# Altium PCB ARDUINO.PcbDoc
Units mm, origin at the board's own origin, x right, y up, seen from the top; angles counter-clockwise.
Board outline 68.53 x 53.3 mm, 2 copper layers (Top Layer, Bottom Layer); 16 components, 30 nets, 68 pads, 7 vias.
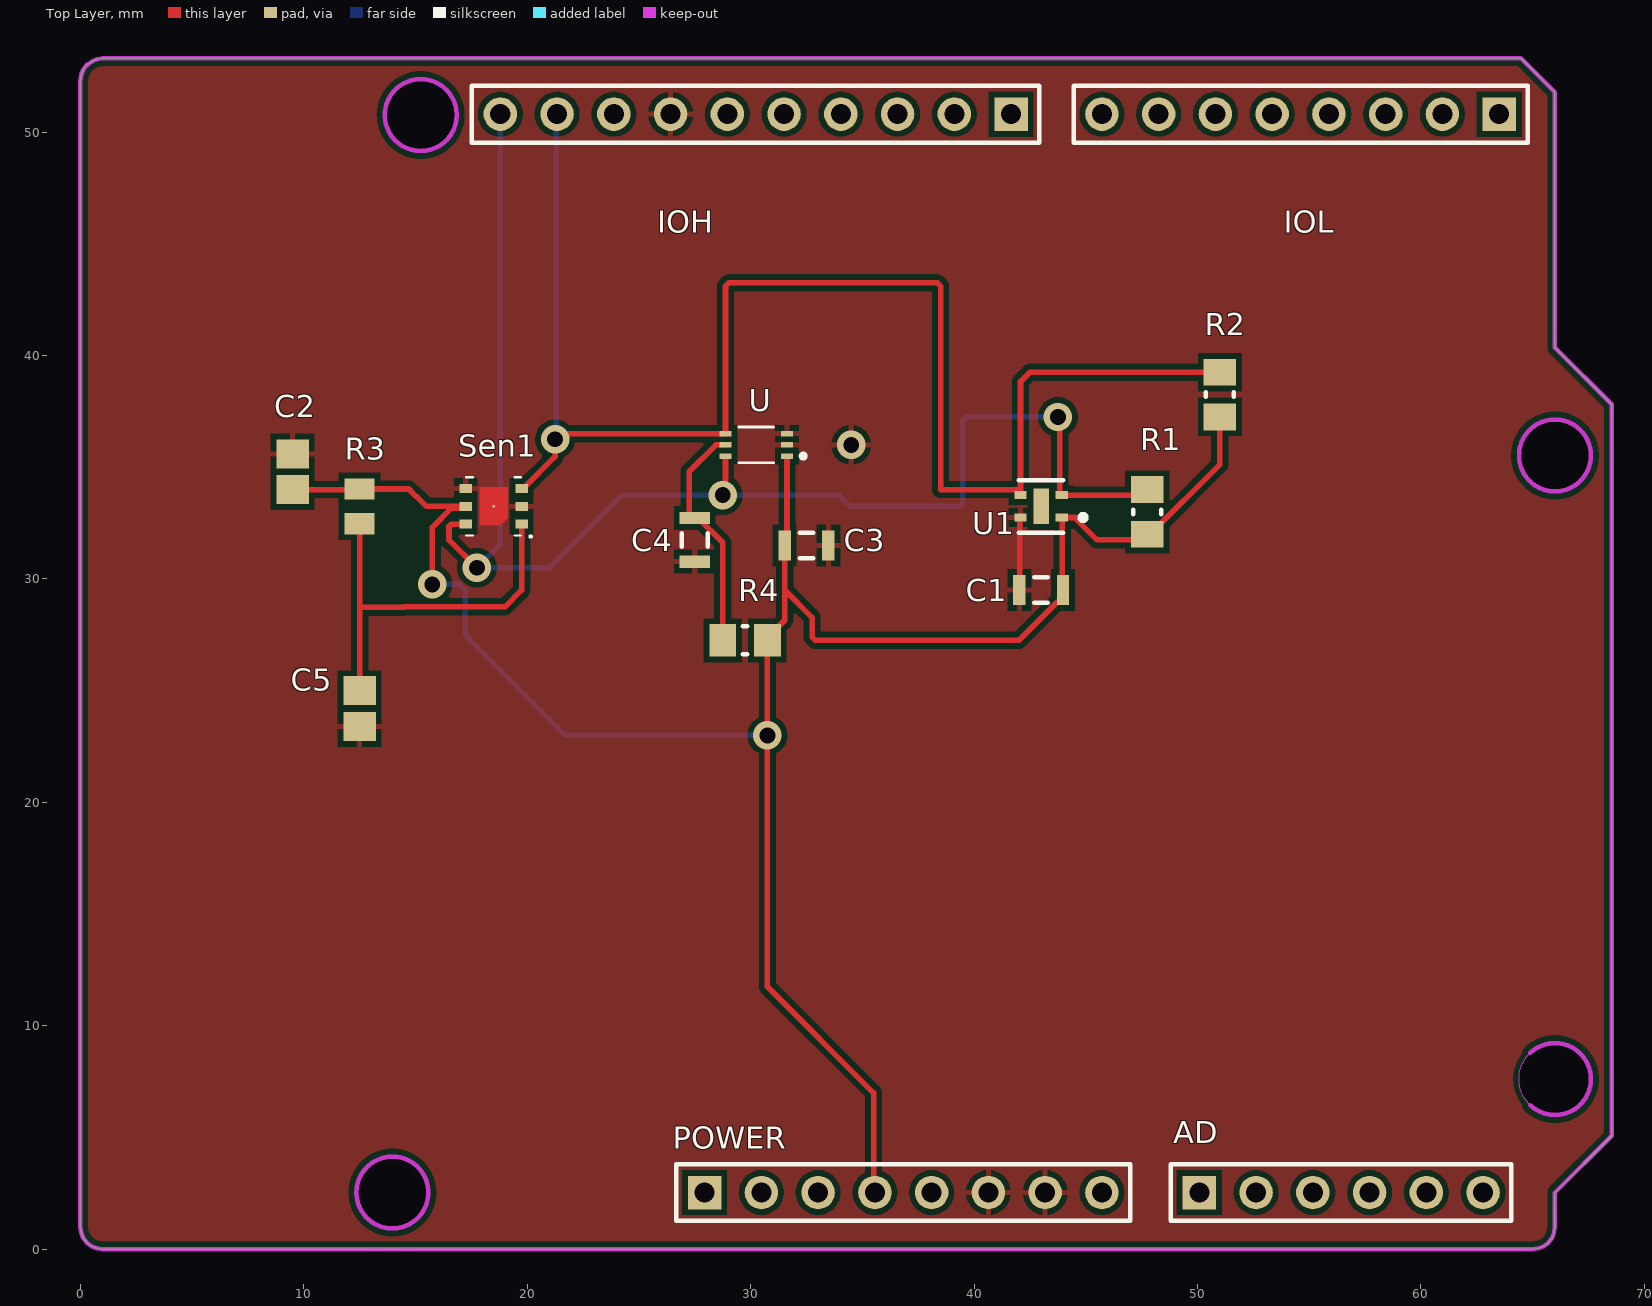
[diagram p0: Top Layer view]
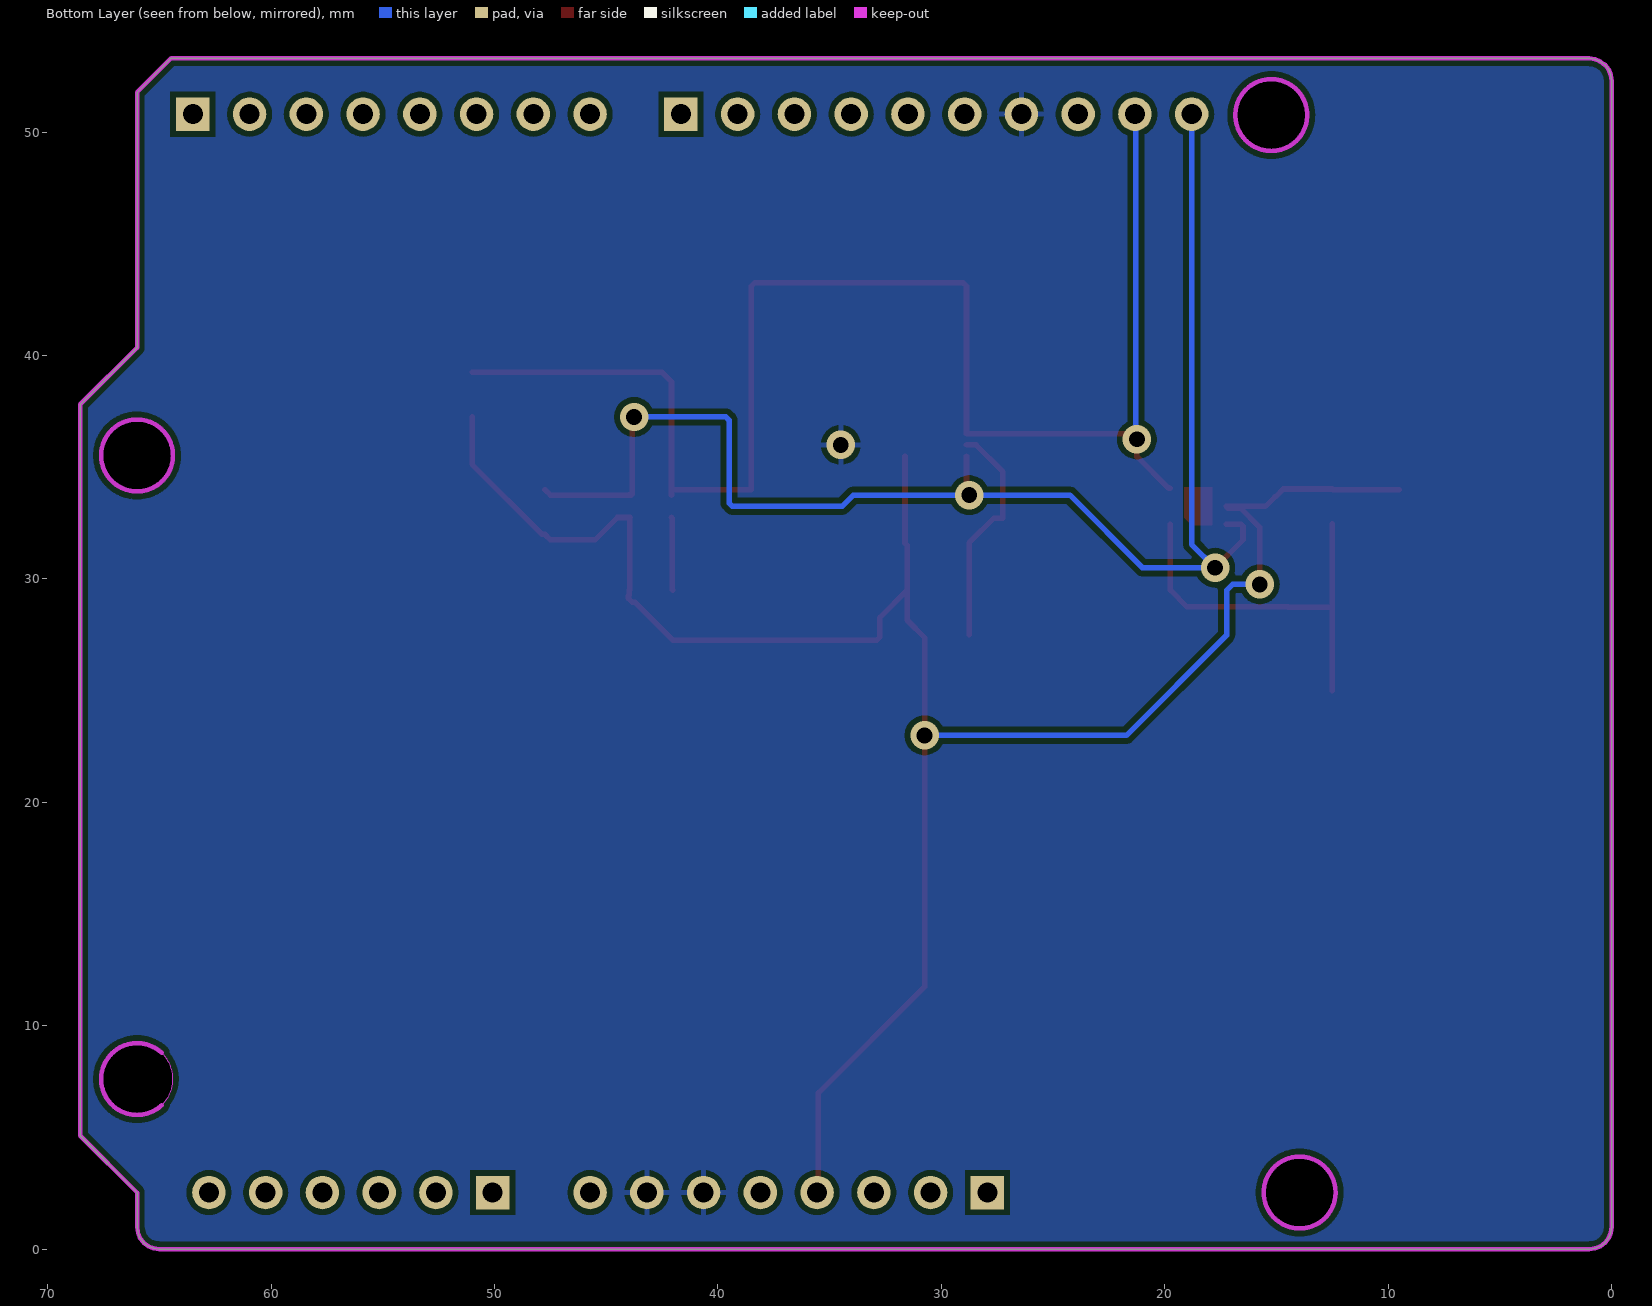
[diagram p1: Bottom Layer view, seen from below]

## Layer stack, top to bottom
Top Solder: solder mask 0.0102, Solder Resist, Dk 3.5
Top Layer: signal copper 0.0356
Dielectric 1: dielectric 0.32, FR-4, Dk 4.8
Bottom Layer: signal copper 0.0356
Bottom Solder: solder mask 0.0102, Solder Resist, Dk 3.5

## Board outline
0.296,0.296 0.127,0.508 0.042,0.741 0,0.994 0,52.284 0.042,52.559 0.127,52.792 0.296,53.004 0.508,53.152 0.741,53.258 0.994,53.3 64.472,53.3 65.996,51.777 65.996,40.351 68.535,37.811 68.535,5.078 65.996,2.539 65.996,0.994 65.953,0.741 65.869,0.508 65.699,0.296 65.488,0.127 65.255,0.042 65.001,0 0.994,0 0.741,0.042 0.508,0.127
cut-out: 12.579,1.724 12.551,1.773 12.526,1.822 12.502,1.873 12.479,1.924 12.459,1.976 12.44,2.028 12.424,2.081 12.409,2.135 12.396,2.189 12.384,2.244 12.375,2.299 12.368,2.354 12.362,2.409 12.359,2.465 12.357,2.521 12.357,2.576 12.36,2.632 12.364,2.687 12.37,2.743 12.378,2.798 12.388,2.853 12.4,2.907 12.413,2.961 12.429,3.015 12.446,3.068 12.466,3.12 12.487,3.172 12.509,3.222 12.534,3.272 12.56,3.322 12.588,3.37 12.618,3.417 12.649,3.463 12.682,3.508 12.716,3.552 12.752,3.595 12.789,3.636 12.828,3.676 12.868,3.715 12.909,3.752 12.952,3.788 12.996,3.822 13.041,3.855 13.087,3.886 13.134,3.916 13.183,3.944 13.232,3.97 13.282,3.995 13.333,4.018 13.384,4.039 13.436,4.058 13.489,4.075 13.543,4.091 13.597,4.104 13.651,4.116 13.706,4.126 13.761,4.134 13.817,4.14 13.872,4.145 13.928,4.147 13.984,4.147 14.039,4.145 14.095,4.142 14.15,4.136 14.206,4.129 14.261,4.12 14.315,4.109 14.369,4.096 14.423,4.081 14.476,4.064 14.529,4.045 14.58,4.025 14.632,4.003 14.682,3.979 14.731,3.953 14.78,3.926 14.827,3.896 14.874,3.866 14.919,3.834 14.964,3.8 15.007,3.764 15.048,3.728 15.089,3.689 15.128,3.65 15.166,3.609 15.202,3.566 15.237,3.523 15.27,3.478 15.302,3.433 15.332,3.386 15.361,3.338 15.388,3.289 15.413,3.239 15.436,3.189 15.458,3.137 15.478,3.085 15.496,3.032 15.512,2.979 15.526,2.925 15.539,2.871 15.549,2.816 15.558,2.761 15.564,2.706 15.569,2.65 15.572,2.595 15.573,2.539 15.572,2.483 15.569,2.427 15.564,2.371 15.558,2.315 15.549,2.26 15.538,2.205 15.525,2.15 15.511,2.096 15.494,2.042 15.476,1.989 15.456,1.937 15.434,1.885 15.41,1.834 15.385,1.784 15.358,1.735 15.329,1.687 15.298,1.64 15.266,1.594 15.232,1.549 15.197,1.505 15.16,1.463 15.122,1.422 15.082,1.382 15.041,1.344 14.999,1.307 14.955,1.272 14.91,1.238 14.864,1.206 14.817,1.175 14.769,1.146 14.72,1.119 14.67,1.094 14.619,1.07 14.567,1.048 14.515,1.028 14.462,1.01 14.408,0.993 14.354,0.979 14.299,0.966 14.244,0.955 14.189,0.947 14.133,0.94 14.077,0.935 14.021,0.932 13.965,0.931 13.909,0.932 13.854,0.935 13.798,0.94 13.743,0.946 13.688,0.955 13.633,0.966 13.579,0.978 13.525,0.992 13.472,1.009 13.419,1.027 13.367,1.046 13.316,1.068 13.265,1.091 13.215,1.117 13.166,1.143 13.119,1.172 13.072,1.202 13.026,1.234 12.981,1.267 12.938,1.302 12.895,1.338 12.855,1.376 12.815,1.415 12.777,1.456 12.74,1.498 12.705,1.541 12.671,1.585 12.638,1.63 12.608,1.677
cut-out: 64.609,6.803 64.582,6.851 64.556,6.901 64.532,6.951 64.51,7.002 64.489,7.054 64.471,7.106 64.454,7.159 64.439,7.213 64.426,7.267 64.415,7.322 64.406,7.377 64.398,7.432 64.393,7.487 64.389,7.543 64.388,7.599 64.388,7.654 64.39,7.71 64.394,7.766 64.4,7.821 64.408,7.876 64.418,7.931 64.43,7.985 64.444,8.039 64.459,8.093 64.477,8.146 64.496,8.198 64.517,8.25 64.54,8.301 64.564,8.351 64.591,8.4 64.619,8.448 64.648,8.495 64.679,8.541 64.712,8.586 64.747,8.63 64.782,8.673 64.82,8.714 64.858,8.754 64.898,8.793 64.94,8.83 64.983,8.866 65.026,8.901 65.071,8.933 65.118,8.965 65.165,8.994 65.213,9.022 65.262,9.048 65.312,9.073 65.363,9.096 65.415,9.117 65.467,9.136 65.52,9.153 65.573,9.169 65.627,9.183 65.682,9.195 65.737,9.204 65.792,9.212 65.847,9.219 65.903,9.223 65.958,9.225 66.014,9.225 66.07,9.224 66.125,9.22 66.181,9.215 66.236,9.207 66.291,9.198 66.346,9.187 66.4,9.174 66.453,9.159 66.507,9.142 66.559,9.123 66.611,9.103 66.662,9.081 66.712,9.057 66.762,9.031 66.81,9.004 66.858,8.975 66.904,8.944 66.95,8.912 66.994,8.878 67.037,8.843 67.079,8.806 67.119,8.767 67.159,8.728 67.196,8.687 67.233,8.645 67.268,8.601 67.301,8.557 67.333,8.511 67.363,8.464 67.391,8.416 67.418,8.367 67.443,8.317 67.467,8.267 67.488,8.216 67.508,8.163 67.526,8.111 67.542,8.057 67.557,8.004 67.569,7.949 67.58,7.895 67.588,7.839 67.595,7.784 67.6,7.729 67.603,7.673 67.604,7.617 67.603,7.561 67.6,7.505 67.595,7.449 67.588,7.394 67.579,7.338 67.568,7.283 67.556,7.228 67.541,7.174 67.525,7.12 67.507,7.067 67.487,7.015 67.465,6.963 67.441,6.912 67.415,6.862 67.388,6.813 67.359,6.765 67.329,6.718 67.296,6.672 67.263,6.627 67.227,6.584 67.191,6.541 67.152,6.5 67.113,6.461 67.072,6.422 67.029,6.385 66.986,6.35 66.941,6.316 66.895,6.284 66.848,6.254 66.8,6.225 66.75,6.197 66.7,6.172 66.65,6.148 66.598,6.126 66.546,6.106 66.492,6.088 66.439,6.072 66.385,6.057 66.33,6.044 66.275,6.034 66.219,6.025 66.164,6.018 66.108,6.013 66.052,6.01 65.996,6.009 65.94,6.01 65.884,6.013 65.829,6.018 65.773,6.025 65.718,6.033 65.664,6.044 65.609,6.056 65.555,6.071 65.502,6.087 65.449,6.105 65.397,6.125 65.346,6.146 65.295,6.17 65.246,6.195 65.197,6.222 65.149,6.25 65.102,6.28 65.056,6.312 65.012,6.345 64.968,6.38 64.926,6.416 64.885,6.454 64.845,6.493 64.807,6.534 64.77,6.576 64.735,6.619 64.701,6.663 64.669,6.709 64.638,6.755
cut-out: 64.609,34.712 64.582,34.76 64.556,34.809 64.532,34.86 64.51,34.911 64.489,34.963 64.471,35.015 64.454,35.068 64.439,35.122 64.426,35.176 64.415,35.231 64.406,35.286 64.398,35.341 64.393,35.396 64.389,35.452 64.388,35.508 64.388,35.563 64.39,35.619 64.394,35.675 64.4,35.73 64.408,35.785 64.418,35.84 64.43,35.894 64.444,35.948 64.459,36.002 64.477,36.055 64.496,36.107 64.517,36.159 64.54,36.21 64.564,36.26 64.591,36.309 64.619,36.357 64.648,36.404 64.679,36.45 64.712,36.495 64.747,36.539 64.782,36.582 64.82,36.623 64.858,36.663 64.898,36.702 64.94,36.739 64.983,36.775 65.026,36.81 65.071,36.842 65.118,36.874 65.165,36.903 65.213,36.931 65.262,36.957 65.312,36.982 65.363,37.005 65.415,37.026 65.467,37.045 65.52,37.062 65.573,37.078 65.627,37.092 65.682,37.103 65.737,37.113 65.792,37.121 65.847,37.128 65.903,37.132 65.958,37.134 66.014,37.134 66.07,37.133 66.125,37.129 66.181,37.124 66.236,37.116 66.291,37.107 66.346,37.096 66.4,37.083 66.453,37.068 66.507,37.051 66.559,37.032 66.611,37.012 66.662,36.99 66.712,36.966 66.762,36.94 66.81,36.913 66.858,36.884 66.904,36.853 66.95,36.821 66.994,36.787 67.037,36.751 67.079,36.715 67.119,36.676 67.159,36.637 67.196,36.596 67.233,36.554 67.268,36.51 67.301,36.465 67.333,36.42 67.363,36.373 67.391,36.325 67.418,36.276 67.443,36.226 67.467,36.176 67.488,36.124 67.508,36.072 67.526,36.02 67.542,35.966 67.557,35.913 67.569,35.858 67.58,35.803 67.588,35.748 67.595,35.693 67.6,35.638 67.603,35.582 67.604,35.526 67.603,35.47 67.6,35.414 67.595,35.358 67.588,35.302 67.579,35.247 67.568,35.192 67.556,35.137 67.541,35.083 67.525,35.029 67.507,34.976 67.487,34.924 67.465,34.872 67.441,34.821 67.415,34.771 67.388,34.722 67.359,34.674 67.329,34.627 67.296,34.581 67.263,34.536 67.227,34.493 67.191,34.45 67.152,34.409 67.113,34.37 67.072,34.331 67.029,34.294 66.986,34.259 66.941,34.225 66.895,34.193 66.848,34.163 66.8,34.134 66.75,34.106 66.7,34.081 66.65,34.057 66.598,34.035 66.546,34.015 66.492,33.997 66.439,33.98 66.385,33.966 66.33,33.953 66.275,33.943 66.219,33.934 66.164,33.927 66.108,33.922 66.052,33.919 65.996,33.918 65.94,33.919 65.884,33.922 65.829,33.927 65.773,33.934 65.718,33.942 65.664,33.953 65.609,33.965 65.555,33.98 65.502,33.996 65.449,34.014 65.397,34.034 65.346,34.055 65.295,34.079 65.246,34.104 65.197,34.131 65.149,34.159 65.102,34.189 65.056,34.221 65.012,34.254 64.968,34.289 64.926,34.325 64.885,34.363 64.845,34.402 64.807,34.443 64.77,34.485 64.735,34.528 64.701,34.572 64.669,34.617 64.638,34.664
cut-out: 13.848,49.946 13.821,49.995 13.795,50.044 13.771,50.094 13.749,50.146 13.728,50.197 13.71,50.25 13.693,50.303 13.678,50.357 13.665,50.411 13.654,50.465 13.645,50.52 13.637,50.576 13.632,50.631 13.628,50.687 13.627,50.742 13.627,50.798 13.629,50.854 13.633,50.909 13.639,50.965 13.647,51.02 13.657,51.075 13.669,51.129 13.683,51.183 13.698,51.237 13.716,51.29 13.735,51.342 13.756,51.393 13.779,51.444 13.803,51.494 13.83,51.543 13.858,51.592 13.887,51.639 13.919,51.685 13.951,51.73 13.986,51.774 14.022,51.817 14.059,51.858 14.098,51.898 14.138,51.937 14.179,51.974 14.222,52.01 14.266,52.044 14.311,52.077 14.357,52.108 14.404,52.138 14.452,52.166 14.501,52.192 14.551,52.217 14.602,52.239 14.654,52.26 14.706,52.28 14.759,52.297 14.812,52.313 14.866,52.326 14.921,52.338 14.976,52.348 15.031,52.356 15.086,52.362 15.142,52.366 15.197,52.369 15.253,52.369 15.309,52.367 15.364,52.364 15.42,52.358 15.475,52.351 15.53,52.342 15.585,52.33 15.639,52.317 15.693,52.302 15.746,52.286 15.798,52.267 15.85,52.247 15.901,52.224 15.951,52.2 16.001,52.175 16.049,52.147 16.097,52.118 16.143,52.088 16.189,52.055 16.233,52.021 16.276,51.986 16.318,51.949 16.359,51.911 16.398,51.871 16.435,51.83 16.472,51.788 16.507,51.745 16.54,51.7 16.572,51.654 16.602,51.607 16.63,51.56 16.657,51.511 16.682,51.461 16.706,51.41 16.727,51.359 16.747,51.307 16.765,51.254 16.781,51.201 16.796,51.147 16.808,51.093 16.819,51.038 16.827,50.983 16.834,50.928 16.839,50.872 16.842,50.817 16.843,50.761 16.842,50.705 16.839,50.649 16.834,50.593 16.827,50.537 16.818,50.482 16.808,50.427 16.795,50.372 16.78,50.318 16.764,50.264 16.746,50.211 16.726,50.158 16.704,50.107 16.68,50.056 16.654,50.006 16.627,49.957 16.598,49.909 16.568,49.862 16.536,49.816 16.502,49.771 16.466,49.727 16.43,49.685 16.391,49.644 16.352,49.604 16.311,49.566 16.268,49.529 16.225,49.494 16.18,49.46 16.134,49.428 16.087,49.397 16.039,49.368 15.99,49.341 15.94,49.316 15.889,49.292 15.837,49.27 15.785,49.25 15.732,49.232 15.678,49.215 15.624,49.201 15.569,49.188 15.514,49.177 15.458,49.168 15.403,49.162 15.347,49.157 15.291,49.154 15.235,49.153 15.179,49.154 15.123,49.157 15.068,49.161 15.012,49.168 14.957,49.177 14.903,49.187 14.848,49.2 14.795,49.214 14.741,49.23 14.688,49.248 14.636,49.268 14.585,49.29 14.534,49.313 14.485,49.338 14.436,49.365 14.388,49.394 14.341,49.424 14.295,49.456 14.251,49.489 14.207,49.524 14.165,49.56 14.124,49.598 14.084,49.637 14.046,49.678 14.009,49.719 13.974,49.762 13.94,49.807 13.908,49.852 13.877,49.899

## Design rules (kind name [scope] priority, off if disabled: settings)
Clearance [All] p1: gap=0.25 ignorepadtopadclearanceinfootprint=FALSE
PolygonConnect [All] p1: connectstyle=Relief reliefconductorwidth=0.25 reliefentries=4 polygonreliefangle="90 Angle" airgapwidth=0.25
RoomDefinition Minized [InComponentClass('Minized')] p1: confinementstyle=ConfineIn formatcopy=TRUE lockcomponents=FALSE outline -6.036,-158.689 44.764,-158.689 44.764,-133.289 -6.036,-133.289
RoutingVias [All] p1: holewidth=0.711 width=1.27 viastyle="Through Hole" minholewidth=0.711 minwidth=1.27 maxholewidth=0.711 maxwidth=1.27
SolderMaskExpansion [All] p1: expansion=0.102 istentingtop=FALSE
Width [All] p1: maxlimit=0.25 minlimit=0.25 preferedwidth=0.25
30 further rules are at their usual default settings.

## Components (designator, comment, footprint, x,y, rotation, side; value= is the part's Value field where it differs from the comment)
AD "Header 6" HDR1X6 50.08,2.54 r0 top locked
C1 "C2012X7R1H104K085AA" CAPC2013X145X20LL20 43,29.5 r180 top
C2 "08051A102JAT2A" CAPC2013X140X50NL20T25 9.5,34.8 r270 top
C3 "C2012X7R1H104K085AA" CAPC2013X145X20LL20 32.5,31.5 r180 top
C4 "C2012X7R1H104K085AA" CAPC2013X145X20LL20 27.5,31.75 r90 top
C5 "08051A102JAT2A" CAPC2013X140X50NL20T25 12.5,24.2 r90 top
IOH "MHDR1X10" HDR1X10 41.656,50.8 r180 top locked
IOL "Header 8" HDR1X8 63.5,50.8 r180 top locked
POWER "Header 8" HDR1X8 27.94,2.54 r0 top locked
R1 "RC0805FR-071KL" RESC2013X60X35ML10T20 47.75,33 r270 top
R2 "RC0805FR-071KL" RESC2013X60X35ML10T20 51,38.25 r90 top
R3 "ERJ-6GEYJ4R7V" RESC2013X70X40LL20T20 12.5,33.25 r270 top
R4 "RC0805FR-071KL" RESC2013X60X35ML10T20 29.75,27.25 r0 top
Sen1 "SGP" SGPx4x 18.5,33.25 r180 top
U "BH1750FVI-TR" XDCR_BH1750FVI-TR 30.25,36 r180 top
U1 "SHTC3" FP-SHTC3-MFG 43,33.25 r180 top

## Footprints (in the part's own frame and the unit in brackets; to place one, negate y for a bottom-side part, rotate by r counter-clockwise, add the part's x,y. Pads: shape width x height; smd on the part's side, far side on the other; paste and mask are expansions set on the pad)
CAPC2013X140X50NL20T25 [mm] "Chip Capacitor, 2-Leads, Body 2.00x1.25mm, IPC Medium Density"
  rect 1.3x1.45 smd: 1(-0.8,0) 2(0.8,0)
  body extent -1.1,-0.72 1.1,0.72, height 1.4
CAPC2013X145X20LL20 [mm] "Chip Capacitor, 2-Leads, Body 2.20x1.45mm, IPC High Density"
  rect 0.55x1.35 smd: 1(-0.975,0) 2(0.975,0)
  silkscreen extent -0.3,-0.58 0.3,0.58, body extent -1.1,-0.72 1.1,0.72, height 1.45
FP-SHTC3-MFG [mm]
  rect 0.55x0.35 smd paste-1000 mask-1000: 1(-0.925,0.5) 2(-0.925,-0.5) 3(0.925,-0.5) 4(0.925,0.5)
  rect 0.7x1.6 smd paste-1000 mask+0: 5(0,0)
  silkscreen extent -2,-1.17 1,1.17, body extent -1.4,-1.1 1.4,1.1, height 0.25
HDR1X6 [mm] "Connector; Header; 6 Position"
  rect 1.5x1.5 hole 0.9: 1(0,0)
  round 1.5 hole 0.9: 2(2.54,0) 3(5.08,0) 4(7.62,0) 5(10.16,0) 6(12.7,0)
  silkscreen extent -1.27,-1.27 13.97,1.27
HDR1X8 [mm] "Connector; Header; 8 Position"
  rect 1.5x1.5 hole 0.9: 1(0,0)
  round 1.5 hole 0.9: 2(2.54,0) 3(5.08,0) 4(7.62,0) 5(10.16,0) 6(12.7,0) 7(15.24,0) 8(17.78,0)
  silkscreen extent -1.27,-1.27 19.05,1.27
HDR1X10 [mm] "Connector; Header; 10 Position"
  rect 1.5x1.5 hole 0.9: 1(0,0)
  round 1.5 hole 0.9: 2(2.54,0) 3(5.08,0) 4(7.62,0) 5(10.16,0) 6(12.7,0) 7(15.24,0) 8(17.78,0) 9(20.32,0) 10(22.86,0)
  silkscreen extent -1.27,-1.27 24.13,1.27
RESC2013X60X35ML10T20 [mm] "Chip Resistor, 2-Leads, Body 2.1x1.35mm, IPC Low Density"
  rect 1.2x1.45 smd: 1(-1,0) 2(1,0)
  silkscreen extent -0.1,-0.63 0.1,0.63, body extent -1.05,-0.68 1.05,0.67, height 0.6
RESC2013X70X40LL20T20 [mm] "Chip Resistor, 2-Leads, Body 2.00x1.25mm, IPC High Density"
  rect 0.95x1.35 smd: 1(-0.775,0) 2(0.775,0)
  body extent -1.1,-0.72 1.1,0.72, height 0.7
SGPx4x [mm] "SON, 6-Leads, Body 2.45x2.45mm, Pitch 0.80mm, Thermal Pad 1.70x1.25mm, IPC Medium Density"
  rrect0% 0.55x0.4 smd: 1(-1.25,0.8) 2(-1.25,0) 3(-1.25,-0.8) 4(1.25,-0.8) 5(1.25,0) 6(1.25,0.8)
  rect 0.1x0.1 smd paste-0.625 mask-0.2: 7(0,0)
  Top Layer region: 0.625,0.85 -0.295,0.85 -0.625,0.52 -0.625,-0.85 0.625,-0.85
  silkscreen extent -1.7,-1.3 1.22,1.4, body extent -1.22,-1.22 1.22,1.22, height 0.85
XDCR_BH1750FVI-TR [mm]
  rect 0.55x0.25 smd: 1(-1.375,0.5) 2(-1.375,0) 3(-1.375,-0.5) 4(1.375,-0.5) 5(1.375,0) 6(1.375,0.5)
  silkscreen extent -2.2,-0.8 0.78,0.8

## Part data
AD: "Header, 6-Pin", LatestRevisionDate=17-Jul-2002, LatestRevisionNote="Re-released for DXP Platform.", Publisher="Altium Limited"
C1 C3 C4: library part CMP-2000-07557-1, "Chip Capacitor, 0.1 uF, +/- 10%, 50 V, -55 to 125 degC, 0805 (2012 Metric), RoHS, Tape and Reel", Capacitance=100nF, Case Code (Imperial)=0805, Case Code (Metric)=2012, Dielectric=X7R, Dielectric Material=Ceramic, Manufacturer=TDK, Max Operating Temperature=125degC, Min Operating Temperature=-55degC, Package Description="2-Pin Surface Mount Device, Body 2 x 1.25 mm", Package Quantity=1, Package Reference=805, Tolerance=10%, Voltage=50V, Case/Package=0805, Composition=Ceramic, Datasheet URL=https://product.tdk.com/info/en/catalog/datasheets/mlcc_commercial_general_en.pdf, Datasheet Version=07/2017, Depth=1.25mm, Height=0.85mm, Lead Free=LeadFree, Length=2mm, Manufacturer URL=http://www.tdk.com/, Mount=SurfaceMount, Mounting Technology=SurfaceMount, Number of Pins=2, Packaging=TapeandReel, Radiation Hardening=No, REACH SVHC=NoSVHC, RoHSCompliant=True, Termination=SMD/SMT, Thickness=0.037inch, Voltage Rating=50V, Voltage Rating (DC)=50V, Weight=0.000194oz, Width=0.049inch
C2 C5: library part CMP-2007-04527-1, Manufacturer="AVX Interconnect / Elco", Part Number=08051A102JAT2A
IOH: "Header, 10-Pin", LatestRevisionDate=17-Jul-2002, LatestRevisionNote="Re-released for DXP Platform.", Publisher="Altium Limited"
IOL POWER: "Header, 8-Pin", LatestRevisionDate=17-Jul-2002, LatestRevisionNote="Re-released for DXP Platform.", Publisher="Altium Limited"
R1 R2 R4: library part CMP-2100-03671-1, "Chip Resistor, 1 KOhm, +/- 1%, 125 mW, -55 to 155 degC, 0805 (2012 Metric), RoHS, Tape and Reel", Case Code (Imperial)=0805, Case Code (Metric)=2012, Manufacturer=Yageo, Max Operating Temperature=155degC, Max Power Dissipation=125mW, Min Operating Temperature=-55degC, Package Description="2-Pin Surface Mounted Device, Body 2 x 1.25 mm", Package Quantity=1, Resistance=1KOhm, Temperature Coefficient=100ppm/degreesC, Tolerance=1%, Voltage Rating=150V, Case/Package=0805, Composition=ThickFilm, Datasheet URL=http://www.yageo.com/NewPortal/yageodocoutput?fileName=/pdf/R-Chip/PYu-RC_Group_51_RoHS_L_5.pdf, Datasheet Version="Rev. 5, 10/2016", Depth=1.25mm, Height=0.024inch, Lead Free=LeadFree, Length=0.079inch, Manufacturer URL=http://www.yageo.com/, Military Standard=Not, Number of Pins=2, Number of Terminations=2, Package Reference=0805, Packaging=TapeandReel, Power Rating=125mW, REACH SVHC=Unknown, RoHSCompliant=true, Termination=SMD/SMT, Voltage Rating (DC)=150V, Width=0.049inch
R3: library part CMP-2001-00424-1, Manufacturer=Panasonic, Part Number=ERJ-6GEYJ4R7V
U: "Optical Sensor Ambient 560nm IÂ²C 6-SMD, Flat Lead Exposed Pad", Package="SMD-6 Rohm", Availability=Unavailable, MF=Rohm, MP=BH1750FVI-TR, Price=None, SnapEDA_Link=https://www.snapeda.com/parts/BH1750FVI-TR/Rohm/view-part/106507/?ref=snap
U1: library part CMP-144040-000003-1, "SENSOR HUMI/TEMP I2C 2% SMD", Manufacturer=Sensirion, Max Supply Voltage=3.6V, Min Supply Voltage=1.62V, Operating Supply Current=0.3-900uA, Package=0, Temperature="-40°C to +125°C", Temperature Range High=+125°C, Temperature Range Low=-40°C, Accuracy=2%, Automotive=No, Category=IC, ComponentLink2Description=Datasheet, ComponentLink2URL=https://www.sensirion.com/fileadmin/user_upload/customers/sensirion/Dokumente/0_Datasheets/Humidity/Sensirion_Humidity_Sensors_SHTC3_Datasheet.pdf, Device Class L1=Sensors, Device Class L2="Temperature and Humidity Sensors", Device Class L3=unset, Digikey Description="SENSOR HUMI/TEMP I2C 2% SMD", Height=0.75mm, Interface=I2C, Ipc Land Pattern Name=DFN200X200X75-4, Lead Free=Yes, Manufacturer Part Number=SHTC3, Mouser Description="SHTC3 Series 0 to 100% RH 3.6 V Humidity and Temperature Sensor IC - DFN-4", Octopart=https://octopart.com/shtc3-sensirion-91912225, Resolution=16bits, RoHS=TRUE, Sensor Output=I2C

## Via types
v1: diameter 1.27, hole 0.711, Top Layer to Bottom Layer, tented both sides, 7 vias

## Nets (pads, with @x,y where several pads share a name; then routed paths per layer and width w, separated by ;. In a path a pad name is that pad's centre, name@x,y a point inside that pad or via, vN(x,y) a via of type N, cw(c..) or ccw(c..) an arc to the next point about the centre after c; other vN are vias at no path point)
3V3_AS: C1.1 C2.2 C3.2 POWER.4 R1.2 R2.1 R3.1 R4.2 Sen1.5 U1.1 U.1 | length 96.2
  Top Layer w0.25: C2.2 12.475,34 R3.1 14.7,34.025 15.05,33.675 15.075,33.675 15.5,33.25 Sen1.5 17.175,33.175 16.614,33.175 15.75,32.311 v1(15.75,29.76) ; U.1 31.625,31.6 C3.2 31.525,29.5 ; POWER.4 35.5,2.6 35.5,7 30.75,11.75 30.75,23.5 R4.2 30.75,27.375 31.525,28.15 31.525,29.5 ; R2.1 51,35.125 47.875,32 R1.2 47.5,31.75 45.5,31.75 44.5,32.75 U1.1 43.95,32.725 43.95,29.525 C1.1 43.975,29.275 44,29.25 44,29.125 43.825,28.95 43.7,28.95 42,27.25 32.896,27.25 32.75,27.396 32.75,28.275 31.525,29.5
  Bottom Layer w0.25: v1(15.75,29.76) 16.962,29.76 17.232,29.49 17.232,27.482 21.714,23 v1(30.75,23)
5V0_AS: POWER.5
ARDUINO_A0: AD.1
ARDUINO_A1: AD.2
ARDUINO_A2: AD.4
ARDUINO_A3: AD.3
ARDUINO_A4: AD.5
ARDUINO_A5: AD.6
ARDUINO_IO0: IOL.1
ARDUINO_IO1: IOL.2
ARDUINO_IO2: IOL.3
ARDUINO_IO3: IOL.4
ARDUINO_IO4: IOL.5
ARDUINO_IO5: IOL.6
ARDUINO_IO6: IOL.7
ARDUINO_IO7: IOL.8
ARDUINO_IO8: IOH.1
ARDUINO_IO9: IOH.2
ARDUINO_IO10: IOH.3
ARDUINO_IO11: IOH.4
ARDUINO_IO12: IOH.5
ARDUINO_IO13: IOH.6
ARDUINO_RST: POWER.3
ARDUINO_SCL: IOH.10 R1.1 Sen1.6 U1.2 U.6 | length 65
  Top Layer w0.25: Sen1.6 16.596,32.45 16.5,32.354 16.5,31.75 v1(17.75,30.5) ; IOH.10@18.75,50.5 18.796,50.546 IOH.10 ; v1(28.75,33.75) 28.875,33.875 U.6 ; v1(43.75,37.25) 43.837,37.162 43.837,33.8 43.887,33.75 U1.2 43.95,33.75 43.975,33.775 44,33.75 47.5,33.75 R1.1
  Bottom Layer w0.25: IOH.10@18.75,50.754 IOH.10 18.796,31.546 v1(17.75,30.5) 21,30.5 24.25,33.75 v1(28.75,33.75) 33.94,33.75 34.44,33.25 39.354,33.25 39.5,33.396 39.5,37.104 39.646,37.25 v1(43.75,37.25)
ARDUINO_SDA: IOH.9 R2.2 Sen1.3 U1.3 U.4 | length 68.4
  Top Layer w0.25: Sen1.3 ccw(c19.75,34.231) 19.878,34.103 21.25,35.475 v1(21.25,36.25) 21.526,36.25 21.776,36.5 U.4 28.875,43.104 29.021,43.25 38.354,43.25 38.5,43.104 38.5,34 42.075,34 ; U1.3 42.075,34 ; R2.2 42.5,39.25 42.075,38.825 42.075,34
  Bottom Layer w0.25: v1(21.25,36.25) 21.293,36.293 21.293,50.757 IOH.9
GND: C1.2 C2.1 C3.1 C4.1 C5.1 IOH.7 POWER.6 POWER.7 Sen1.2 Sen1.4 Sen1.7 U1.4 U.2 U.3 | length 3.3
  Top Layer w0.25: C1.2 42.05,29.525 42.05,32.725 U1.4
  other v1: 34.5,36
IOREF: POWER.2
NetC4_2: C4.2 R4.1 U.5 | length 10.3
  Top Layer w0.25: R4.1@28.75,27.5 28.75,31.625 27.65,32.725 27.25,32.725 27.25,32.95 27.25,34.805 28.445,36 U.5
NetC5_2: C5.2 R3.2 Sen1.1 | length 18
  Top Layer w0.25: C5.2 12.5,28.738 ; R3.2 12.5,28.738 ; Sen1.1 19.75,29.5 19,28.75 14.5,28.75 14.487,28.738 12.5,28.738
VREF: IOH.8
pads on no net: POWER.1 POWER.8 U1.5

## Polygon pours and split planes (outlines as drawn)
GND on Top Layer "GND_L01_P006" (solid, remove dead copper, pour order 6): 0.375,-0.125 ccw(c0.979,0.479) 0.979,-0.375 69.125,-0.375 ccw(c68.521,0.229) 69.375,0.229 69.375,53.375 -0.375,53.375 cw(c-1.582,52.168) 0.125,52.168 0.125,-0.375 cw(c0.729,-0.979) 0.729,-0.125
GND on Top Layer "GND_L01_P003" (solid, remove dead copper, pour order 3): -0.25,-0.25 68.75,-0.25 68.75,53.25 0,53.25 cw(c0,53.5) -0.25,53.5
GND on Top Layer "GND_L01_P002" (solid, remove dead copper, pour order 2): -0.25,-0.25 68.75,-0.25 68.75,55 66.744,57.006 ccw(c64.948,55.21) 64.948,57.75 0,57.75
GND on Bottom Layer "GND_L02_P008" (solid, remove dead copper, pour order 8): -0.25,-0.5 69,-0.5 69,53.5 -0.5,53.5
GND on Bottom Layer "GND_L02_P004" (solid, remove dead copper, pour order 4): 0,-0.25 68.5,-0.25 68.5,53.25 ccw(c68,53.25) 68,53.75 -0.25,53.75 cw(c-0.25,53.5) 0,53.5

## Keep-outs
Keep-Out Layer:
  lines w0.2: 64.885,6.454 64.926,6.416 64.968,6.38 65.012,6.345 65.056,6.312 65.102,6.28 65.149,6.25 65.197,6.222 65.246,6.195 65.295,6.17 65.346,6.146 65.397,6.125 65.449,6.105 65.502,6.087 65.555,6.071 65.609,6.056 65.664,6.044 65.718,6.033 65.773,6.025 65.829,6.018 65.884,6.013 65.94,6.01 65.996,6.009 66.052,6.01 66.108,6.013 66.164,6.018 66.219,6.025 66.275,6.034 66.33,6.044 66.385,6.057 66.439,6.072 66.492,6.088 66.546,6.106 66.598,6.126 66.65,6.148 66.7,6.172 66.75,6.197 66.8,6.225 66.848,6.254 66.895,6.284 66.941,6.316 66.986,6.35 67.029,6.385 67.072,6.422 67.113,6.461 67.152,6.5 67.191,6.541 67.227,6.584 67.263,6.627 67.296,6.672 67.329,6.718 67.359,6.765 67.388,6.813 67.415,6.862 67.441,6.912 67.465,6.963 67.487,7.015 67.507,7.067 67.525,7.12 67.541,7.174 67.556,7.228 67.568,7.283 67.579,7.338 67.588,7.394 67.595,7.449 67.6,7.505 67.603,7.561 67.604,7.617 67.603,7.673 67.6,7.729 67.595,7.784 67.588,7.839 67.58,7.895 67.569,7.949 67.557,8.004 67.542,8.057 67.526,8.111 67.508,8.163 67.488,8.216 67.467,8.267 67.443,8.317 67.418,8.367 67.391,8.416 67.363,8.464 67.333,8.511 67.301,8.557 67.268,8.601 67.233,8.645 67.196,8.687 67.159,8.728 67.119,8.767 67.079,8.806 67.037,8.843 66.994,8.878 66.95,8.912 66.904,8.944 66.858,8.975 66.81,9.004 66.762,9.031 66.712,9.057 66.662,9.081 66.611,9.103 66.559,9.123 66.507,9.142 66.453,9.159 66.4,9.174 66.346,9.187 66.291,9.198 66.236,9.207 66.181,9.215 66.125,9.22 66.07,9.224 66.014,9.225 65.958,9.225 65.903,9.223 65.847,9.219 65.792,9.212 65.737,9.204 65.682,9.195 65.627,9.183 65.573,9.169 65.52,9.153 65.467,9.136 65.415,9.117 65.363,9.096 65.312,9.073 65.262,9.048 65.213,9.022 65.165,8.994 65.118,8.965 65.071,8.933 65.026,8.901 64.983,8.866 64.94,8.83 64.898,8.793 ; 0,0.994 0,52.284 0.042,52.559 0.127,52.792 0.296,53.004 0.508,53.152 0.741,53.258 0.994,53.3 64.472,53.3 65.996,51.777 65.996,40.351 68.535,37.811 68.535,5.078 65.996,2.539 65.996,0.994 65.953,0.741 65.869,0.508 65.699,0.296 65.488,0.127 65.255,0.042 65.001,0 0.994,0 0.741,0.042 0.508,0.127 0.296,0.296 0.127,0.508 0.042,0.741 0,0.994 ; 12.357,2.521 12.357,2.576 12.36,2.632 12.364,2.687 12.37,2.743 12.378,2.798 12.388,2.853 12.4,2.907 12.413,2.961 12.429,3.015 12.446,3.068 12.466,3.12 12.487,3.172 12.509,3.222 12.534,3.272 12.56,3.322 12.588,3.37 12.618,3.417 12.649,3.463 12.682,3.508 12.716,3.552 12.752,3.595 12.789,3.636 12.828,3.676 12.868,3.715 12.909,3.752 12.952,3.788 12.996,3.822 13.041,3.855 13.087,3.886 13.134,3.916 13.183,3.944 13.232,3.97 13.282,3.995 13.333,4.018 13.384,4.039 13.436,4.058 13.489,4.075 13.543,4.091 13.597,4.104 13.651,4.116 13.706,4.126 13.761,4.134 13.817,4.14 13.872,4.145 13.928,4.147 13.984,4.147 14.039,4.145 14.095,4.142 14.15,4.136 14.206,4.129 14.261,4.12 14.315,4.109 14.369,4.096 14.423,4.081 14.476,4.064 14.529,4.045 14.58,4.025 14.632,4.003 14.682,3.979 14.731,3.953 14.78,3.926 14.827,3.896 14.874,3.866 14.919,3.834 14.964,3.8 15.007,3.764 15.048,3.728 15.089,3.689 15.128,3.65 15.166,3.609 15.202,3.566 15.237,3.523 15.27,3.478 15.302,3.433 15.332,3.386 15.361,3.338 15.388,3.289 15.413,3.239 15.436,3.189 15.458,3.137 15.478,3.085 15.496,3.032 15.512,2.979 15.526,2.925 15.539,2.871 15.549,2.816 15.558,2.761 15.564,2.706 15.569,2.65 15.572,2.595 15.573,2.539 15.572,2.483 15.569,2.427 15.564,2.371 15.558,2.315 15.549,2.26 15.538,2.205 15.525,2.15 15.511,2.096 15.494,2.042 15.476,1.989 15.456,1.937 15.434,1.885 15.41,1.834 15.385,1.784 15.358,1.735 15.329,1.687 15.298,1.64 15.266,1.594 15.232,1.549 15.197,1.505 15.16,1.463 15.122,1.422 15.082,1.382 15.041,1.344 14.999,1.307 14.955,1.272 14.91,1.238 14.864,1.206 14.817,1.175 14.769,1.146 14.72,1.119 14.67,1.094 14.619,1.07 14.567,1.048 14.515,1.028 14.462,1.01 14.408,0.993 14.354,0.979 14.299,0.966 14.244,0.955 14.189,0.947 14.133,0.94 14.077,0.935 14.021,0.932 13.965,0.931 13.909,0.932 13.854,0.935 13.798,0.94 13.743,0.946 13.688,0.955 13.633,0.966 13.579,0.978 13.525,0.992 13.472,1.009 13.419,1.027 13.367,1.046 13.316,1.068 13.265,1.091 13.215,1.117 13.166,1.143 13.119,1.172 13.072,1.202 13.026,1.234 12.981,1.267 12.938,1.302 12.895,1.338 12.855,1.376 12.815,1.415 12.777,1.456 12.74,1.498 12.705,1.541 12.671,1.585 12.638,1.63 12.608,1.677 12.579,1.724 12.551,1.773 12.526,1.822 12.502,1.873 12.479,1.924 12.459,1.976 12.44,2.028 12.424,2.081 12.409,2.135 12.396,2.189 12.384,2.244 12.375,2.299 12.368,2.354 12.362,2.409 12.359,2.465 12.357,2.521 ; 13.627,50.742 13.628,50.687 13.632,50.631 13.637,50.576 13.645,50.52 13.654,50.465 13.665,50.411 13.678,50.357 13.693,50.303 13.71,50.25 13.728,50.197 13.749,50.146 13.771,50.094 13.795,50.044 13.821,49.995 13.848,49.946 13.877,49.899 13.908,49.852 13.94,49.807 13.974,49.762 14.009,49.719 14.046,49.678 14.084,49.637 14.124,49.598 14.165,49.56 14.207,49.524 14.251,49.489 14.295,49.456 14.341,49.424 14.388,49.394 14.436,49.365 14.485,49.338 14.534,49.313 14.585,49.29 14.636,49.268 14.688,49.248 14.741,49.23 14.795,49.214 14.848,49.2 14.903,49.187 14.957,49.177 15.012,49.168 15.068,49.161 15.123,49.157 15.179,49.154 15.235,49.153 15.291,49.154 15.347,49.157 15.403,49.162 15.458,49.168 15.514,49.177 15.569,49.188 15.624,49.201 15.678,49.215 15.732,49.232 15.785,49.25 15.837,49.27 15.889,49.292 15.94,49.316 15.99,49.341 16.039,49.368 16.087,49.397 16.134,49.428 16.18,49.46 16.225,49.494 16.268,49.529 16.311,49.566 16.352,49.604 16.391,49.644 16.43,49.685 16.466,49.727 16.502,49.771 16.536,49.816 16.568,49.862 16.598,49.909 16.627,49.957 16.654,50.006 16.68,50.056 16.704,50.107 16.726,50.158 16.746,50.211 16.764,50.264 16.78,50.318 16.795,50.372 16.808,50.427 16.818,50.482 16.827,50.537 16.834,50.593 16.839,50.649 16.842,50.705 16.843,50.761 16.842,50.817 16.839,50.872 16.834,50.928 16.827,50.983 16.819,51.038 16.808,51.093 16.796,51.147 16.781,51.201 16.765,51.254 16.747,51.307 16.727,51.359 16.706,51.41 16.682,51.461 16.657,51.511 16.63,51.56 16.602,51.607 16.572,51.654 16.54,51.7 16.507,51.745 16.472,51.788 16.435,51.83 16.398,51.871 16.359,51.911 16.318,51.949 16.276,51.986 16.233,52.021 16.189,52.055 16.143,52.088 16.097,52.118 16.049,52.147 16.001,52.175 15.951,52.2 15.901,52.224 15.85,52.247 15.798,52.267 15.746,52.286 15.693,52.302 15.639,52.317 15.585,52.33 15.53,52.342 15.475,52.351 15.42,52.358 15.364,52.364 15.309,52.367 15.253,52.369 15.197,52.369 15.142,52.366 15.086,52.362 15.031,52.356 14.976,52.348 14.921,52.338 14.866,52.326 14.812,52.313 14.759,52.297 14.706,52.28 14.654,52.26 14.602,52.239 14.551,52.217 14.501,52.192 14.452,52.166 14.404,52.138 14.357,52.108 14.311,52.077 14.266,52.044 14.222,52.01 14.179,51.974 14.138,51.937 14.098,51.898 14.059,51.858 14.022,51.817 13.986,51.774 13.951,51.73 13.919,51.685 13.887,51.639 13.858,51.592 13.83,51.543 13.803,51.494 13.779,51.444 13.756,51.393 13.735,51.342 13.716,51.29 13.698,51.237 13.683,51.183 13.669,51.129 13.657,51.075 13.647,51.02 13.639,50.965 13.633,50.909 13.629,50.854 13.627,50.798 13.627,50.742 ; 64.388,35.508 64.388,35.563 64.39,35.619 64.394,35.675 64.4,35.73 64.408,35.785 64.418,35.84 64.43,35.894 64.444,35.948 64.459,36.002 64.477,36.055 64.496,36.107 64.517,36.159 64.54,36.21 64.564,36.26 64.591,36.309 64.619,36.357 64.648,36.404 64.679,36.45 64.712,36.495 64.747,36.539 64.782,36.582 64.82,36.623 64.858,36.663 64.898,36.702 64.94,36.739 64.983,36.775 65.026,36.81 65.071,36.842 65.118,36.874 65.165,36.903 65.213,36.931 65.262,36.957 65.312,36.982 65.363,37.005 65.415,37.026 65.467,37.045 65.52,37.062 65.573,37.078 65.627,37.092 65.682,37.103 65.737,37.113 65.792,37.121 65.847,37.128 65.903,37.132 65.958,37.134 66.014,37.134 66.07,37.133 66.125,37.129 66.181,37.124 66.236,37.116 66.291,37.107 66.346,37.096 66.4,37.083 66.453,37.068 66.507,37.051 66.559,37.032 66.611,37.012 66.662,36.99 66.712,36.966 66.762,36.94 66.81,36.913 66.858,36.884 66.904,36.853 66.95,36.821 66.994,36.787 67.037,36.751 67.079,36.715 67.119,36.676 67.159,36.637 67.196,36.596 67.233,36.554 67.268,36.51 67.301,36.465 67.333,36.42 67.363,36.373 67.391,36.325 67.418,36.276 67.443,36.226 67.467,36.176 67.488,36.124 67.508,36.072 67.526,36.02 67.542,35.966 67.557,35.913 67.569,35.858 67.58,35.803 67.588,35.748 67.595,35.693 67.6,35.638 67.603,35.582 67.604,35.526 67.603,35.47 67.6,35.414 67.595,35.358 67.588,35.302 67.579,35.247 67.568,35.192 67.556,35.137 67.541,35.083 67.525,35.029 67.507,34.976 67.487,34.924 67.465,34.872 67.441,34.821 67.415,34.771 67.388,34.722 67.359,34.674 67.329,34.627 67.296,34.581 67.263,34.536 67.227,34.493 67.191,34.45 67.152,34.409 67.113,34.37 67.072,34.331 67.029,34.294 66.986,34.259 66.941,34.225 66.895,34.193 66.848,34.163 66.8,34.134 66.75,34.106 66.7,34.081 66.65,34.057 66.598,34.035 66.546,34.015 66.492,33.997 66.439,33.98 66.385,33.966 66.33,33.953 66.275,33.943 66.219,33.934 66.164,33.927 66.108,33.922 66.052,33.919 65.996,33.918 65.94,33.919 65.884,33.922 65.829,33.927 65.773,33.934 65.718,33.942 65.664,33.953 65.609,33.965 65.555,33.98 65.502,33.996 65.449,34.014 65.397,34.034 65.346,34.055 65.295,34.079 65.246,34.104 65.197,34.131 65.149,34.159 65.102,34.189 65.056,34.221 65.012,34.254 64.968,34.289 64.926,34.325 64.885,34.363 64.845,34.402 64.807,34.443 64.77,34.485 64.735,34.528 64.701,34.572 64.669,34.617 64.638,34.664 64.609,34.712 64.582,34.76 64.556,34.809 64.532,34.86 64.51,34.911 64.489,34.963 64.471,35.015 64.454,35.068 64.439,35.122 64.426,35.176 64.415,35.231 64.406,35.286 64.398,35.341 64.393,35.396 64.389,35.452 64.388,35.508

## Silkscreen, mask and mechanical layers (free items; w line width, h text height)
Mechanical 2:
  text "X : 41.656mm" at 17.5,55.75 h1.52
  text "X : 63.5mm" at 56.75,55.25 h1.52
  text "Y : 50.8mm" at 17.5,54.25 h1.52
  text "Y : 50.8mm" at 56.75,53.75 h1.52
  text "X : 27.94mm" at 26.75,-1.5 h1.52
  text "X : 50.8mm" at 53.25,-1.5 h1.52
  text "Y : 2.54mm" at 26.75,-3 h1.52
  text "Y : 2.54mm" at 53.25,-3 h1.52
Mechanical 4:
  circle w0.1: c0,5.078 r0.05
  circle w0.1: c68.535,5.078 r0.05
  circle w0.1: c0.994,53.3 r0.05